# EAGLE board tascud ver01 (EAGLE 8.1.0)
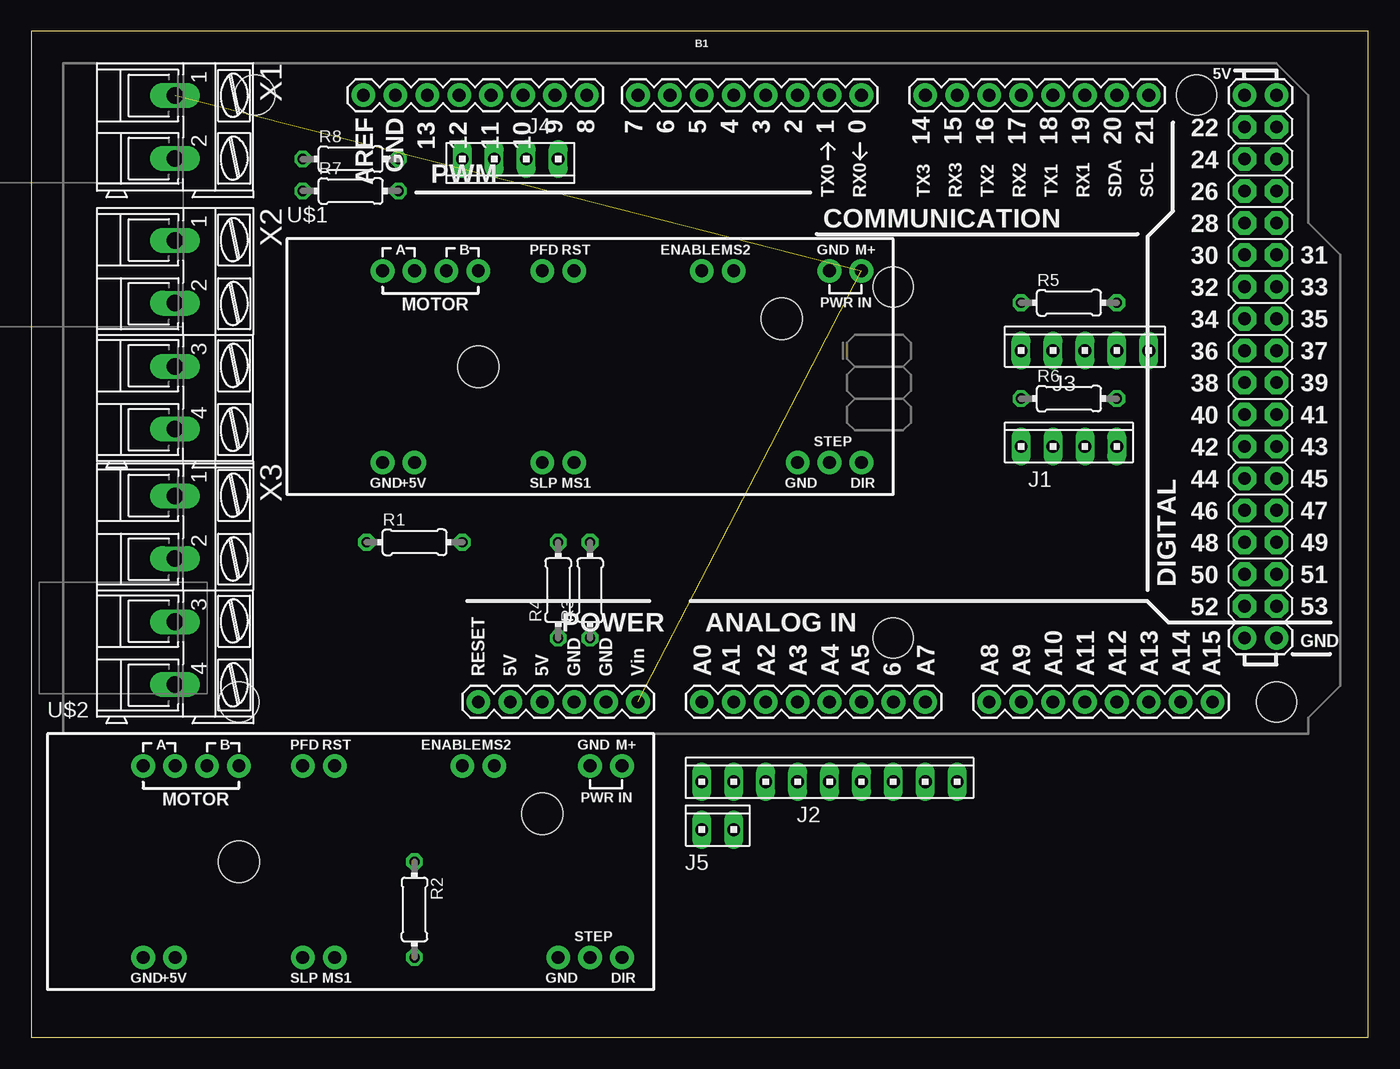
[diagram p0: board, top side]
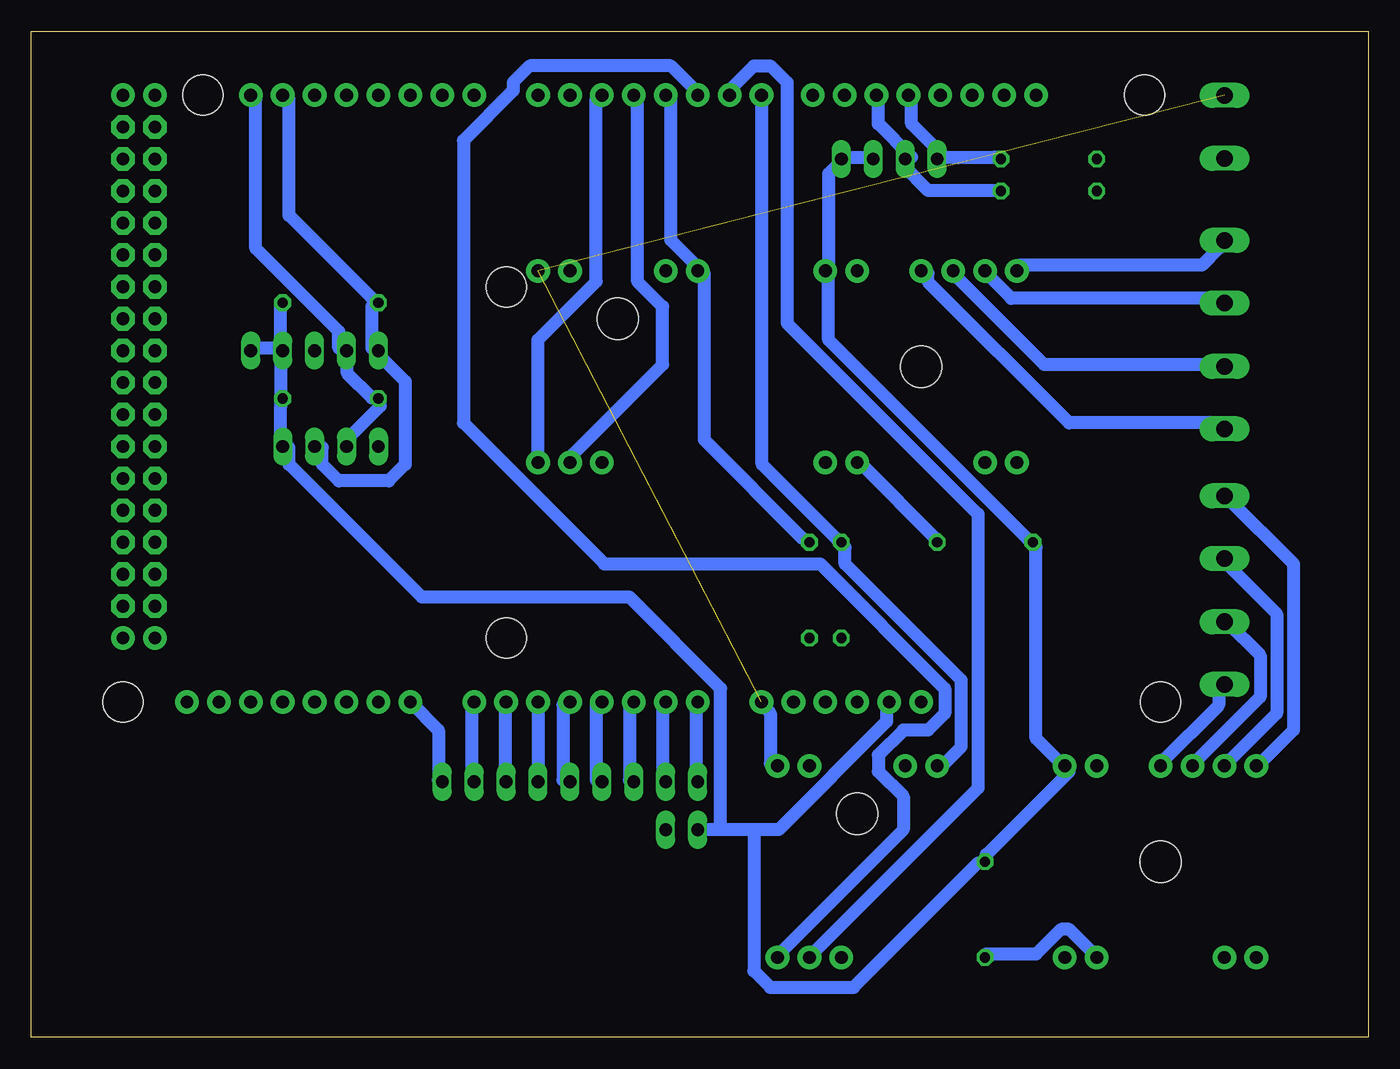
[diagram p1: board, bottom side, seen from below]

Size 106.35 x 80 mm. Coordinates in mm from the lower left corner, seen from the top.
Outline: 0,0 106.35,0 106.35,80 0,80 0,0
Copper layers (1*16): Top 0.035mm / dielectric 1.5mm / Bottom 0.035mm
Design rules "default *": minimum track width 40mil, minimum drill 24mil, track to track 8mil, track to pad 8mil, pad to pad 8mil, via to via 8mil, smd to smd 8mil, copper to edge 40mil, drill to drill 8mil, minimum pad ring 10mil, minimum via ring 8mil, stop-mask expansion 4mil, vias tented up to drill 0mil, thermal gap 10mil
Net classes: 0 default: width 0.635 mm, drill 0.381 mm, clearance 0.305 mm

## Footprints (pad centres in the part's own frame; a part is rotated, then mirrored left to right if it is on the bottom)
ARDUINO_MEGA = drill 1.016 pad 1.88: 0 13.97,24.13; 1 11.43,24.13; 2 8.89,24.13; 3 6.35,24.13; 3.3V -13.97,-24.13; 4 3.81,24.13; 5 1.27,24.13; 5V@0 -11.43,-24.13; 5V@1 44.45,24.13; 5V@2 46.99,24.13; 6 -1.27,24.13; 7 -3.81,24.13; 8 -7.874,24.13; 9 -10.414,24.13; 10 -12.954,24.13; 11 -15.494,24.13; 12 -18.034,24.13; 13 -20.574,24.13; 14 19.05,24.13; 15 21.59,24.13; 16 24.13,24.13; 17 26.67,24.13; 18 29.21,24.13; 19 31.75,24.13; 20 34.29,24.13; 21 36.83,24.13; A0 1.27,-24.13; A1 3.81,-24.13; A2 6.35,-24.13; A3 8.89,-24.13; A4 11.43,-24.13; A5 13.97,-24.13; A6 16.51,-24.13; A7 19.05,-24.13; A8 24.13,-24.13; A9 26.67,-24.13; A10 29.21,-24.13; A11 31.75,-24.13; A12 34.29,-24.13; A13 36.83,-24.13; A14 39.37,-24.13; A15 41.91,-24.13; AREF -25.654,24.13; GND@0 -8.89,-24.13; GND@1 -6.35,-24.13; GND@2 44.45,-19.05; GND@3 46.99,-19.05; GND@4 -23.114,24.13; RESET -16.51,-24.13; VIN -3.81,-24.13 | drill 1.016 pad 1.88 octagon: 22 44.45,21.59; 23 46.99,21.59; 24 44.45,19.05; 25 46.99,19.05; 26 44.45,16.51; 27 46.99,16.51; 28 44.45,13.97; 29 46.99,13.97; 30 44.45,11.43; 31 46.99,11.43; 32 44.45,8.89; 33 46.99,8.89; 34 44.45,6.35; 35 46.99,6.35; 36 44.45,3.81; 37 46.99,3.81; 38 44.45,1.27; 39 46.99,1.27; 40 44.45,-1.27; 41 46.99,-1.27; 42 44.45,-3.81; 43 46.99,-3.81; 44 44.45,-6.35; 45 46.99,-6.35; 46 44.45,-8.89; 47 46.99,-8.89; 48 44.45,-11.43; 49 46.99,-11.43; 50 44.45,-13.97; 51 46.99,-13.97; 52 44.45,-16.51; 53 46.99,-16.51 | hole 3.2: -34.29,24.13; -35.56,-24.13; 16.51,8.89; 16.51,-19.05; 40.64,24.13; 46.99,-24.13
10X04MTA = drill 1.016 long: 1 3.81,0; 2 1.27,0; 3 -1.27,0; 4 -3.81,0
10X09MTA = drill 1.016 long: 1 10.16,0; 2 7.62,0; 3 5.08,0; 4 2.54,0; 5 0,0; 6 -2.54,0; 7 -5.08,0; 8 -7.62,0; 9 -10.16,0
10X05MTA = drill 1.016 long: 1 5.08,0; 2 2.54,0; 3 0,0; 4 -2.54,0; 5 -5.08,0
10X02MTA = drill 1.016 long: 1 1.27,0; 2 -1.27,0
0204/7 = drill 0.813 octagon: 1 -3.81,0; 2 3.81,0
EASYDRIVER_V44 = drill 1.016 pad 1.88: A1 -16.51,7.62; A2 -13.97,7.62; B1 -8.89,7.62; B2 -11.43,7.62; DIR 21.59,-7.62; ENABLE 8.89,7.62; GND1 19.05,7.62; GND2 16.51,-7.62; GND3 -16.51,-7.62; M+ 21.59,7.62; MS1 -1.27,-7.62; MS2 11.43,7.62; P$11 -13.97,-7.62; PFD -3.81,7.62; RST -1.27,7.62; SLEEP -3.81,-7.62; STEP 19.05,-7.62 | hole 3.302: 15.24,3.81; -8.89,0
AK300/2 = drill 1.321 long: 1 -2.515,0; 2 2.489,0
AK300/4 = drill 1.321 long: 1 -7.493,0; 2 -2.515,0; 3 2.515,0; 4 7.493,0

## Placement (x,y rotation side)
B1  ARDUINO_MEGA_R3FULL  [ARDUINO_MEGA]  52.07,50.8 0 top
J1  [10X04MTA]  82.55,46.99 0 top
J2  [10X09MTA]  63.5,20.32 0 top
J3  [10X05MTA]  83.82,54.61 0 top
J4  [10X04MTA]  38.1,69.85 180 top
J5  [10X02MTA]  54.61,16.51 0 top
R1  1k  [0204/7]  30.48,39.37 0 top
R2  1k  [0204/7]  30.48,10.16 270 top
R3  1k  [0204/7]  44.45,35.56 90 top
R4  1k  [0204/7]  41.91,35.56 90 top
R5  1k  [0204/7]  82.55,58.42 0 top
R6  1k  [0204/7]  82.55,50.8 0 top
R7  1k  [0204/7]  25.4,67.31 0 top
R8  1k  [0204/7]  25.4,69.85 0 top
U$1  EASYDRIVER_V44  [EASYDRIVER_V44]  44.45,53.34 0 top
U$2  EASYDRIVER_V44  [EASYDRIVER_V44]  25.4,13.97 0 top
X1  [AK300/2]  11.43,72.39 270 top
X2  [AK300/4]  11.43,55.88 270 top
X3  [AK300/4]  11.43,35.56 270 top

## Library data of the parts
B1 = SparkFun-Boards
J1-J5 = con-amp
R1-R8 = rcl
U$1 U$2 = EasyDriver
X1-X3 = con-ptr500; OC_FARNELL: unknown; OC_NEWARK: unknown

## Nets
3.3V: B1.3.3V J1.1 J3.1 J3.2 J4.3 J4.4 J5.2 R1.1 R2.1 R5.2 R6.2 U$1.RST U$2.RST
12V: B1.VIN U$1.M+ U$2.M+ X1.1
N$1: B1.2 U$1.DIR
N$2: U$2.MS2
N$3: B1.4 R3.2 U$1.ENABLE
N$4: B1.5 U$2.DIR
N$5: B1.6 U$2.STEP
N$6: B1.7 R4.2 U$2.ENABLE
N$7: B1.A1 J2.8
N$8: B1.A2 J2.7
N$9: U$1.A1 X2.1
N$10: U$1.A2 X2.2
N$11: U$1.B2 X2.3
N$12: U$1.B1 X2.4
N$13: U$2.A1 X3.1
N$14: U$2.A2 X3.2
N$15: U$2.B2 X3.3
N$16: U$2.B1 X3.4
N$17: B1.3 U$1.STEP
N$18: B1.A7 J2.2
N$19: R2.2 U$2.SLEEP
N$20: R1.2 U$1.SLEEP
N$21: B1.A3 J2.6
N$22: B1.11 J4.1 R8.2
N$23: B1.A8 J2.1
N$24: B1.A4 J2.5
N$25: B1.A5 J2.4
N$26: B1.A0 J2.9
N$27: B1.A6 J2.3
N$28: U$2.GND1
N$36: B1.10 J4.2 R7.2
SCL: B1.21 J1.3 J3.4 R6.1
SDA: B1.20 J1.2 J3.5 R5.1

## Tracks (layer width: path | path; a pad name or v marks a point on that pad's centre or on a via)
3.3V
  Bottom 1.016: J4.3 39.62,70 41.6,70 J4.4 42.27,69.34 42.93,68.68 42.93,61.42 U$1.RST 42.93,60.76 42.93,55.47 27.08,39.62 R1.1 26.42,38.96 26.42,23.77 24.43,21.79 U$2.RST 23.77,21.13 30.38,14.53 R2.1 31.04,13.87 40.95,3.96 47.55,3.96 48.87,5.28 48.87,16.51 | 86.51,54.81 86.51,58.12 R5.2 | 86.51,54.81 88.49,54.81 J3.1 | 86.51,54.81 J3.2 86.51,54.15 86.51,50.85 R6.2 86.51,50.19 86.51,47.55 J1.1 85.85,46.89 85.85,45.57 75.29,35 58.78,35 51.51,27.74 51.51,16.51 | 48.87,16.51 46.89,16.51 38.3,25.09 38.3,26.42 B1.3.3V | 48.87,16.51 51.51,16.51 | 51.51,16.51 J5.2
12V  (2 unrouted)
  Bottom 1.016: U$2.M+ 47.55,21.79 47.55,25.76 48.21,26.42 B1.VIN
N$1
  Bottom 1.016: U$1.DIR 66.04,55.47 61.42,60.1 61.42,74.62 B1.2
N$3
  Bottom 1.016: R3.2 44.91,39.62 52.83,47.55 52.83,60.76 U$1.ENABLE 53.49,61.42 55.47,63.4 55.47,74.62 B1.4
N$4
  Bottom 1.016: U$2.DIR 46.89,6.6 36.98,16.51 36.98,19.15 38.96,21.13 38.96,22.45 36.98,24.43 35,24.43 33.68,25.76 33.68,27.74 43.59,37.64 60.76,37.64 71.98,48.87 71.98,71.32 68.02,75.29 68.02,75.95 66.7,77.27 55.47,77.27 53.49,75.29 B1.5
N$5
  Bottom 1.016: U$2.STEP 44.25,6.6 31.04,19.81 31.04,41.6 46.23,56.79 46.23,75.95 47.55,77.27 48.87,77.27 50.85,75.29 B1.6
N$6
  Bottom 1.016: U$2.ENABLE 33.68,21.79 32.36,23.11 32.36,28.4 41.6,37.64 41.6,38.96 R4.2 42.27,39.62 48.21,45.57 48.21,74.62 B1.7
N$7
  Bottom 1.016: J2.8 56.13,20.47 56.13,26.42 B1.A1
N$8
  Bottom 1.016: J2.7 58.78,20.47 58.78,26.42 B1.A2
N$9
  Bottom 1.016: U$1.A1 27.74,61.42 13.21,61.42 11.89,62.74 X2.1
N$10
  Bottom 1.016: U$1.A2 30.38,60.76 28.4,58.78 11.89,58.78 X2.2
N$11
  Bottom 1.016: U$1.B2 33.02,60.76 25.76,53.49 11.89,53.49 X2.3
N$12
  Bottom 1.016: U$1.B1 35,60.76 35,60.1 23.77,48.87 11.89,48.87 X2.4
N$13
  Bottom 1.016: U$2.A1 8.59,21.79 5.94,24.43 5.94,37.64 11.23,42.93 X3.1
N$14
  Bottom 1.016: U$2.A2 7.26,25.76 7.26,33.68 11.23,37.64 X3.2
N$15
  Bottom 1.016: U$2.B2 13.87,21.79 8.59,27.08 8.59,30.38 11.23,33.02 X3.3
N$16
  Bottom 1.016: U$2.B1 16.51,21.79 11.89,26.42 11.89,27.74 X3.4
N$17
  Bottom 1.016: B1.3 58.12,74.62 58.12,60.1 56.13,58.12 56.13,53.49 63.4,46.23 U$1.STEP
N$18
  Bottom 1.016: J2.2 71.32,20.47 71.32,26.42 B1.A7
N$19
  Bottom 1.016: R2.2 30.38,6.6 26.42,6.6 24.43,8.59 23.77,8.59 21.79,6.6 U$2.SLEEP
N$20
  Bottom 1.016: R1.2 34.34,39.62 40.28,45.57 U$1.SLEEP
N$21
  Bottom 1.016: J2.6 61.42,20.47 61.42,26.42 B1.A3
N$22
  Bottom 1.016: 33.68,70 29.72,70 R8.2 | 33.68,70 36.32,72.64 36.32,74.62 B1.11 | 33.68,70 J4.1
N$23
  Bottom 1.016: B1.A8 73.97,24.43 73.97,20.47 J2.1
N$24
  Bottom 1.016: J2.5 64.06,20.47 64.06,26.42 B1.A4
N$25
  Bottom 1.016: B1.A5 J2.4
N$26
  Bottom 1.016: J2.9 53.49,20.47 53.49,26.42 B1.A0
N$27
  Bottom 1.016: J2.3 68.68,20.47 68.68,26.42 B1.A6
N$36
  Bottom 1.016: R7.2 29.72,67.36 35,67.36 36.98,69.34 J4.2 36.32,70 38.96,72.64 38.96,74.62 B1.10
SCL
  Bottom 1.016: J1.3 81.23,47.55 78.59,50.19 R6.1 79.25,50.85 81.23,52.83 81.23,54.15 J3.4 81.89,54.81 81.89,56.13 88.49,62.74 88.49,74.62 B1.21
SDA
  Bottom 1.016: J1.2 83.21,46.89 83.21,45.57 81.89,44.25 77.93,44.25 76.61,45.57 76.61,52.17 78.59,54.15 J3.5 79.25,54.81 79.25,58.12 R5.1 79.25,58.78 85.85,65.38 85.85,74.62 B1.20